# EAGLE board utility (EAGLE 7.5.0)
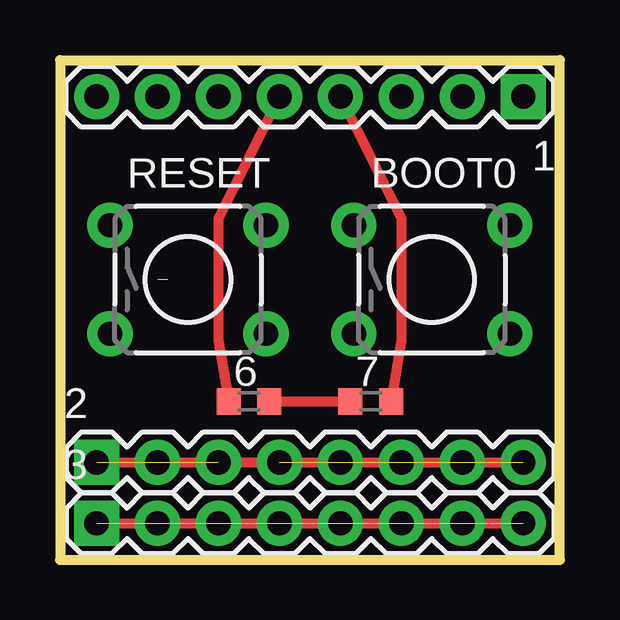
[diagram p0: board, top side]
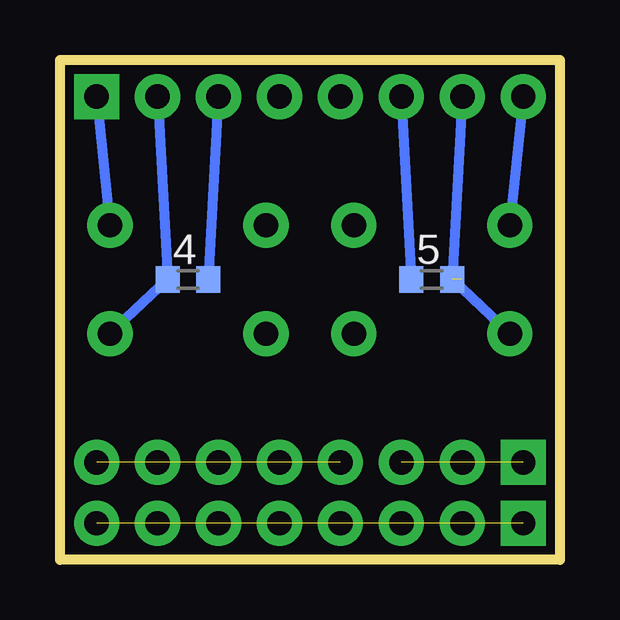
[diagram p1: board, bottom side, seen from below]

Size 20.83 x 20.83 mm. Coordinates in mm from the lower left corner, seen from the top.
Outline: 0,20.83 0,0 20.83,0 20.83,20.83 0,20.83
Copper layers (1*16): Top 0.035mm / dielectric 1.5mm / Bottom 0.035mm
Design rules "default": minimum track width 10mil, minimum drill 24mil, track to track 8mil, track to pad 8mil, pad to pad 8mil, via to via 8mil, smd to smd 8mil, copper to edge 40mil, drill to drill 8mil, minimum pad ring 10mil, minimum via ring 8mil, stop-mask expansion 4mil, vias tented up to drill 0mil, thermal gap 10mil

## Footprints (pad centres in the part's own frame; a part is rotated, then mirrored left to right if it is on the bottom)
1X08 = drill 1.016 pad 1.88 square: 1 0,0 | drill 1.016 pad 1.88: 2 2.54,0; 3 5.08,0; 4 7.62,0; 5 10.16,0; 6 12.7,0; 7 15.24,0; 8 17.78,0
R0603 = smd 1 x 1.1: 1 -0.85,0; 2 0.85,0
TACTILE-PTH = drill 1.016 pad 1.88: 1 -3.251,2.261; 2 3.251,2.261; 3 -3.251,-2.261; 4 3.251,-2.261

## Placement (x,y rotation side)
1  [1X08]  19.3,19.3 180 top
2  [1X08]  1.52,4.06 0 top
3  [1X08]  1.52,1.52 0 top
4  [R0603]  15.49,11.68 0 bottom
5  [R0603]  5.33,11.68 0 bottom
6  [R0603]  7.87,6.6 0 top
7  [R0603]  12.95,6.6 0 top
BOOT0  [TACTILE-PTH]  15.49,11.68 0 top
RESET  [TACTILE-PTH]  5.33,11.68 0 top

## Library data of the parts
1-3 = SparkFun-Connectors
4-7 = resistor
BOOT0 RESET = SparkFun-Electromechanical

## Nets
S$1: 2.1 2.2 2.3 2.4 2.5 2.6 2.7 2.8
S$2: 1.8 RESET.1
S$3: 1.1 BOOT0.2
S$4: 1.2 4.1 BOOT0.4
S$5: 1.7 5.2 RESET.3
S$6: 1.3 4.2
S$7: 1.4 7.2
S$8: 6.2 7.1
S$9: 1.5 6.1
S$10: 1.6 5.1
S$14: 3.1 3.2 3.3 3.4 3.5 3.6 3.7 3.8

## Tracks (layer width: path | path; a pad name or v marks a point on that pad's centre or on a via)
S$1  (6 unrouted)
  Top 0.406: 2.1 2.2 2.3 2.4 2.5 2.6 2.7 2.8
S$2
  Bottom 0.406: 1.8 RESET.1
S$3
  Bottom 0.406: 1.1 BOOT0.2
S$4
  Bottom 0.406: 1.2 4.1 BOOT0.4
S$5  (1 unrouted)
  Bottom 0.406: 1.7 5.2 RESET.3
S$6
  Bottom 0.406: 1.3 4.2
S$7
  Top 0.406: 1.4 14.22,14.22 14.22,9.14 7.2
S$8
  Top 0.406: 6.2 7.1
S$9
  Top 0.406: 1.5 6.6,14.22 6.6,9.14 6.1
S$10
  Bottom 0.406: 1.6 5.1
S$14  (7 unrouted)
  Top 0.406: 3.1 3.2 3.3 3.4 3.5 3.6 3.7 3.8